# Altium PCB 电压过零比较器.PcbDoc
Units mil, origin at the board's own origin, x right, y up, seen from the top; angles counter-clockwise.
Board outline 3543.82 x 1969.02 mil, 2 copper layers (Top Layer, Bottom Layer); 19 components, 13 nets, 52 pads, 2 vias.
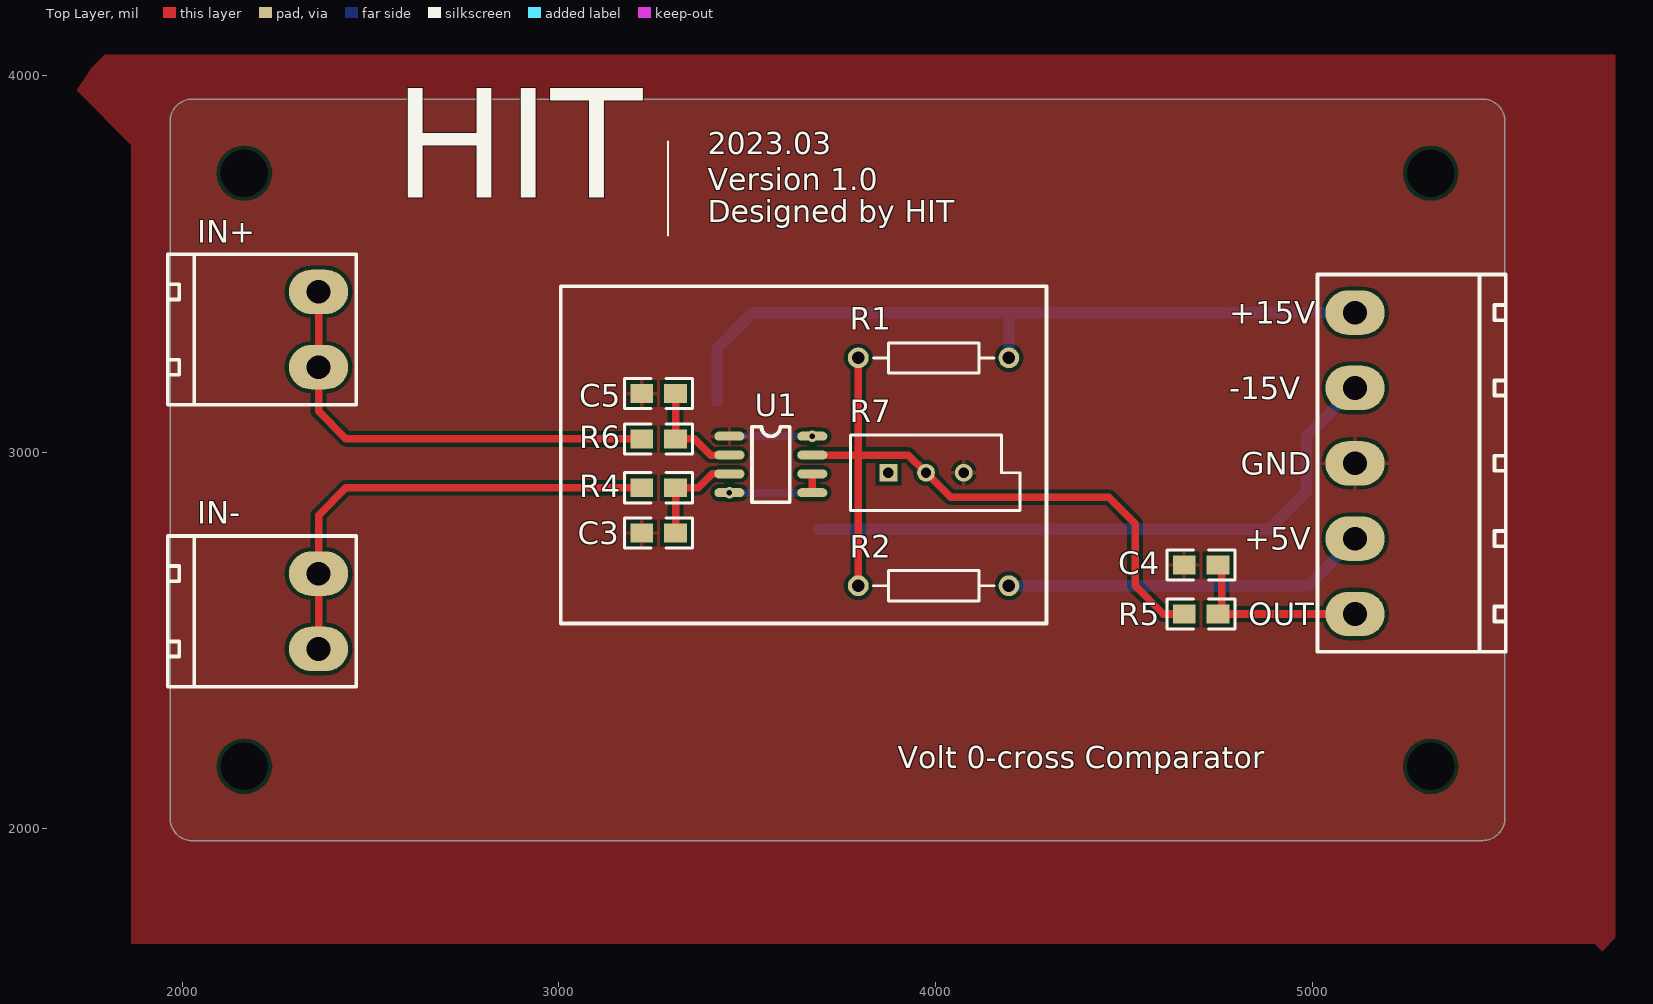
[diagram p0: Top Layer view]
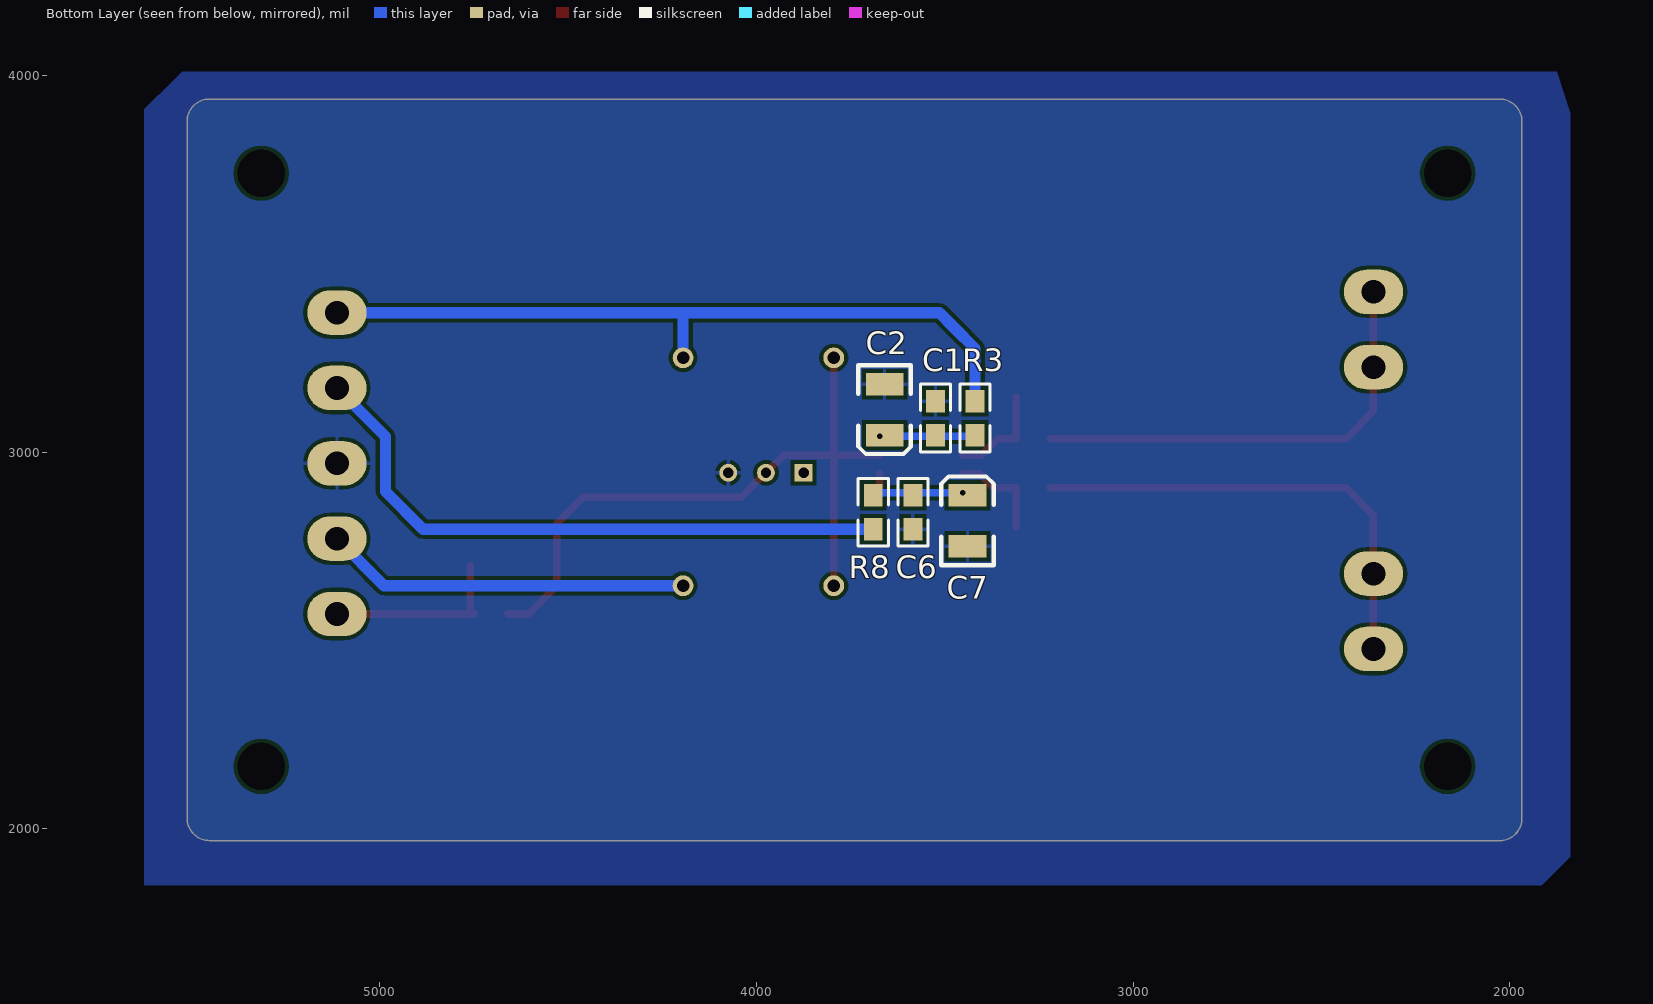
[diagram p1: Bottom Layer view, seen from below]

## Layer stack, top to bottom
Top Layer: signal copper 1.4
Dielectric: dielectric 12.6, FR-4, Dk 4.8
Bottom Layer: signal copper 1.4

## Board outline
1968.5,2027.56 1968.5,3877.95 1967.99,3877.76 cw(c2027.05,3877.76) 2027.05,3936.81 2027.56,3937.01 5452.76,3937.01 cw(c5452.76,3877.95) 5511.81,3877.95 5511.81,2027.56 cw(c5452.76,2027.56) 5452.76,1968.5 2027.56,1968.5 2027.24,1967.99 cw(c2027.24,2027.05)

## Design rules (kind name [scope] priority, off if disabled: settings)
Clearance [All] p1: gap=10
PolygonConnect [All] p1: connectstyle=Relief reliefconductorwidth=10 reliefentries=4 polygonreliefangle="90 Angle" airgapwidth=10
RoutingVias [All] p1: holewidth=28 width=50 viastyle="Through Hole" minholewidth=28 minwidth=50 maxholewidth=28 maxwidth=50
SolderMaskExpansion [All] p1: expansion=4
Width [All] p1: maxlimit=50 minlimit=10 preferedwidth=20
28 further rules are at their usual default settings.

## Classes and differential pairs
component class 电压过零比较器: C1 C2 C3 C4 C5 C6 C7 R1 R2 R3 R4 R5 R6 R7 R8 U1

## Components (designator, comment, footprint, x,y, rotation, side; value= is the part's Value field where it differs from the comment)
C1 "Cap" 0805 3525,3135 r270 bottom
C2 "Cap Pol2" 1210 3660,3045 r90 bottom
C3 "Cap" 0805 3310,2785 r180 top
C4 "Cap" 0805 4660,2700 r0 top
C5 "Cap" 0805 3220,3155 r0 top
C6 "Cap" 0805 3585,2795 r90 bottom
C7 "Cap Pol2" 1210 3440,2885 r270 bottom
IN+ "Header 2" "POWER_2PIN 1" 2362.2,3425.2 r0 top (schematic designator IN+1)
IN- "Header 2" "POWER_2PIN 1" 2362.2,2677.17 r0 top (schematic designator IN-1)
P1 "Header 5" POWER_5PIN 5015,2470 r180 top
R1 "10k" AXIAL-0.4 3995,3250 r180 top
R2 "10k" AXIAL-0.4 3995,2645 r0 top
R3 "Res2" 0805 3420,3045 r90 bottom
R4 "Res2" 0805 3310,2905 r180 top
R5 "Res2" 0805 4660,2570 r0 top
R6 "Res2" 0805 3310,3035 r180 top
R7 "RPot" VR5 3975,2945 r0 top
R8 "Res2" 0805 3690,2885 r270 bottom
U1 "LM311D" SO8 3505,3080 r0 top

## Footprints (in the part's own frame and the unit in brackets; to place one, negate y for a bottom-side part, rotate by r counter-clockwise, add the part's x,y. Pads: shape width x height; smd on the part's side, far side on the other; paste and mask are expansions set on the pad)
0805 [mil]
  rect 60x50 smd: 1(0,0) 2(90,0)
  silkscreen extent -45,-40 135,40
1210 [mil]
  rect 60x100 smd: 1(0,0) 2(135,0)
  silkscreen extent -50,-70 185,70
AXIAL-0.4 [mm]
  round 1.4 hole 0.85: 1(-5.08,0) 2(5.08,0)
  silkscreen extent -4.06,-1.02 4.06,1.02
"POWER_2PIN 1" [mm]
  oval 4x3 hole 1.6: 1(0,-5.08) 2(0,0)
  silkscreen extent -10.16,-7.62 2.54,2.54
POWER_5PIN [mm]
  oval 4x3 hole 1.6: 1(-2.513,-2.54) 2(-2.513,-7.62) 3(-2.513,-12.7) 4(-2.513,-17.78) 5(-2.513,-22.86)
  silkscreen extent -12.67,-25.43 0.03,0
SO8 [mil]
  oval 80x24 smd: 1(-52,-38.04) 2(-52,-88.04) 3(-52,-138.04) 4(-52,-188.04) 5(168,-188.04) 6(168,-138.04) 7(168,-88.04) 8(168,-38.04)
  silkscreen extent 8,-213 108,-13
VR5 [mm] "Thru-Hole; 3 Leads"
  rect 1.2x1.2 hole 0.7: 1(-2.54,0)
  round 1.2 hole 0.7: 2(0,0) 3(2.54,0)
  silkscreen extent -5.08,-2.54 6.35,2.54

## Part data
C1 C3 C4 C5 C6: "电容0805"
C2 C7: "Polarized Capacitor (Axial) 1210"
IN+ IN-: "Header, 2-Pin"
P1: "Header, 5-Pin"
R1 R2: library part RES2, "电阻"
R3 R4 R6 R8: "电阻"
R5: "Resistor"
R7: "Potentiometer"

## Free pads (board coordinates)
  round 60 hole 125.98: 0(2165.35,2165.35) 0(2165.35,3740.16) 0(5314.96,2165.35) 0(5314.96,3740.16)

## Via types
v1: diameter 30, hole 15, Top Layer to Bottom Layer, 2 vias

## Nets (pads, with @x,y where several pads share a name; then routed paths per layer and width w, separated by ;. In a path a pad name is that pad's centre, name@x,y a point inside that pad or via, vN(x,y) a via of type N, cw(c..) or ccw(c..) an arc to the next point about the centre after c; other vN are vias at no path point)
+5V: P1.2 R2.2 | length 970.7
  Bottom Layer w30: R2.2 4988.94,2645 P1.2
+15V: P1.5 R1.1 R3.2 | length 1993.3
  Bottom Layer w30: R3.2 3420,3275 3475,3330 3515,3370 P1.5 ; R1.1 4195,3370
-15V: P1.4 R8.2 | length 1664.8
  Bottom Layer w30: R8.2 4738.94,2795 4885,2795 4985,2895 4985,3041.06 P1.4
GND: C1.1 C2.2 C3.2 C4.1 C5.1 C6.1 C7.2 P1.3 R7.3 U1.1
IN+: IN+.1 IN+.2 R6.2 | length 1205.3
  Top Layer w20: IN+.2 IN+.1 2362.2,3107.8 2435,3035 R6.2
IN-: IN-.1 IN-.2 R4.2 | length 1243
  Top Layer w20: IN-.1 IN-.2 2362.2,2832.2 2435,2905 R4.2
NetC1_2: C1.2 C2.1 R3.1 U1.8 | length 250
  Bottom Layer w20: R3.1@3423.04,3041.96 v1(3673,3041.96)
NetC3_1: C3.1 R4.1 U1.3 | length 263.3
  Top Layer w20: C3.1@3310,2800 R4.1 3370,2905 3406.96,2941.96 3411.96,2941.96 U1.3
NetC5_2: C5.2 R6.1 U1.2 | length 270.8
  Top Layer w20: C5.2@3310,3145 R6.1 3360,3035 3403.04,2991.96 U1.2
NetC6_2: C6.2 C7.1 R8.1 U1.4 | length 230
  Bottom Layer w20: v1(3453,2891.96) R8.1@3683.04,2891.96
NetR1_2: R1.2 R2.1 R5.1 R7.2 U1.7 | length 1863.4
  Top Layer w20: U1.7 3928.04,2991.96 R7.2 4040,2880 4460,2880 4530,2810 4530,2645 4605,2570 R5.1 ; R2.1 R1.2
NetU1_5: U1.5 U1.6 | length 50
  Top Layer w20: U1.5 U1.6
OUT: C4.2 P1.1 R5.2 | length 493.9
  Top Layer w20: R5.2 P1.1 ; R5.2@4760,2570 C4.2@4760,2700
pads on no net: R7.1

## Polygon pours and split planes (outlines as drawn)
GND on Top Layer "Top Layer-GND" (solid, pour order 2): 1760,4020 1795,4055 5805,4055 5805,1710 5770,1675 5750,1695 1865,1695 1865,3815 1720,3960
GND on Bottom Layer "Buttom Layer-GND" (solid, pour order 4): 1875,4010 5525,4010 5545,3990 5625,3910 5625,1850 1915,1850 1885,1880 1840,1925 1840,3900

## Silkscreen, mask and mechanical layers (free items; w line width, h text height)
Top Overlay:
  lines w5: 3290,3575 3290,3825
  lines w10: 3005,2545 4295,2545 4295,3440 3005,3440 3005,2545
  text "2023.03" at 3395,3770 h100
  text "Version 1.0" at 3395,3675 h100
  text "Designed by HIT" at 3395,3590 h100
  text "HIT" at 2560,3580 h500
  text "+15V" at 4780,3340 h60
  text "-15V" at 4780,3140 h60
  text "GND" at 4810,2940 h60
  text "+5V" at 4820,2740 h60
  text "OUT" at 4830,2540 h60
  text "Volt 0-cross Comparator" at 3900,2140 h100
Bottom Solder:
  lines w10: 1967.99,3877.76 cw(c2027.05,3877.76) 2027.05,3936.81 ; 1968.19,2027.05 ccw(c2027.24,2027.05) 2027.24,1967.99 ; 1968.5,2027.56 1968.5,3877.95 ; 2027.56,1968.5 5452.76,1968.5 ccw(c5452.76,2027.56) 5511.81,2027.56 5511.81,3877.95 ccw(c5452.76,3877.95) 5452.76,3937.01 2027.56,3937.01